# Altium PCB PoBoI.PcbDoc (part 3 of 3)
Units mm, origin at the board's own origin, x right, y up, seen from the top; angles counter-clockwise.
Board outline 90.25 x 95.8 mm, 4 copper layers (Top Layer, GND Layer, PWR Layer, Bottom Layer), stack 1.537 mm thick; 250 components, 177 nets, 942 pads, 26 vias.
Unrouted connection lines stored in the file: 170.
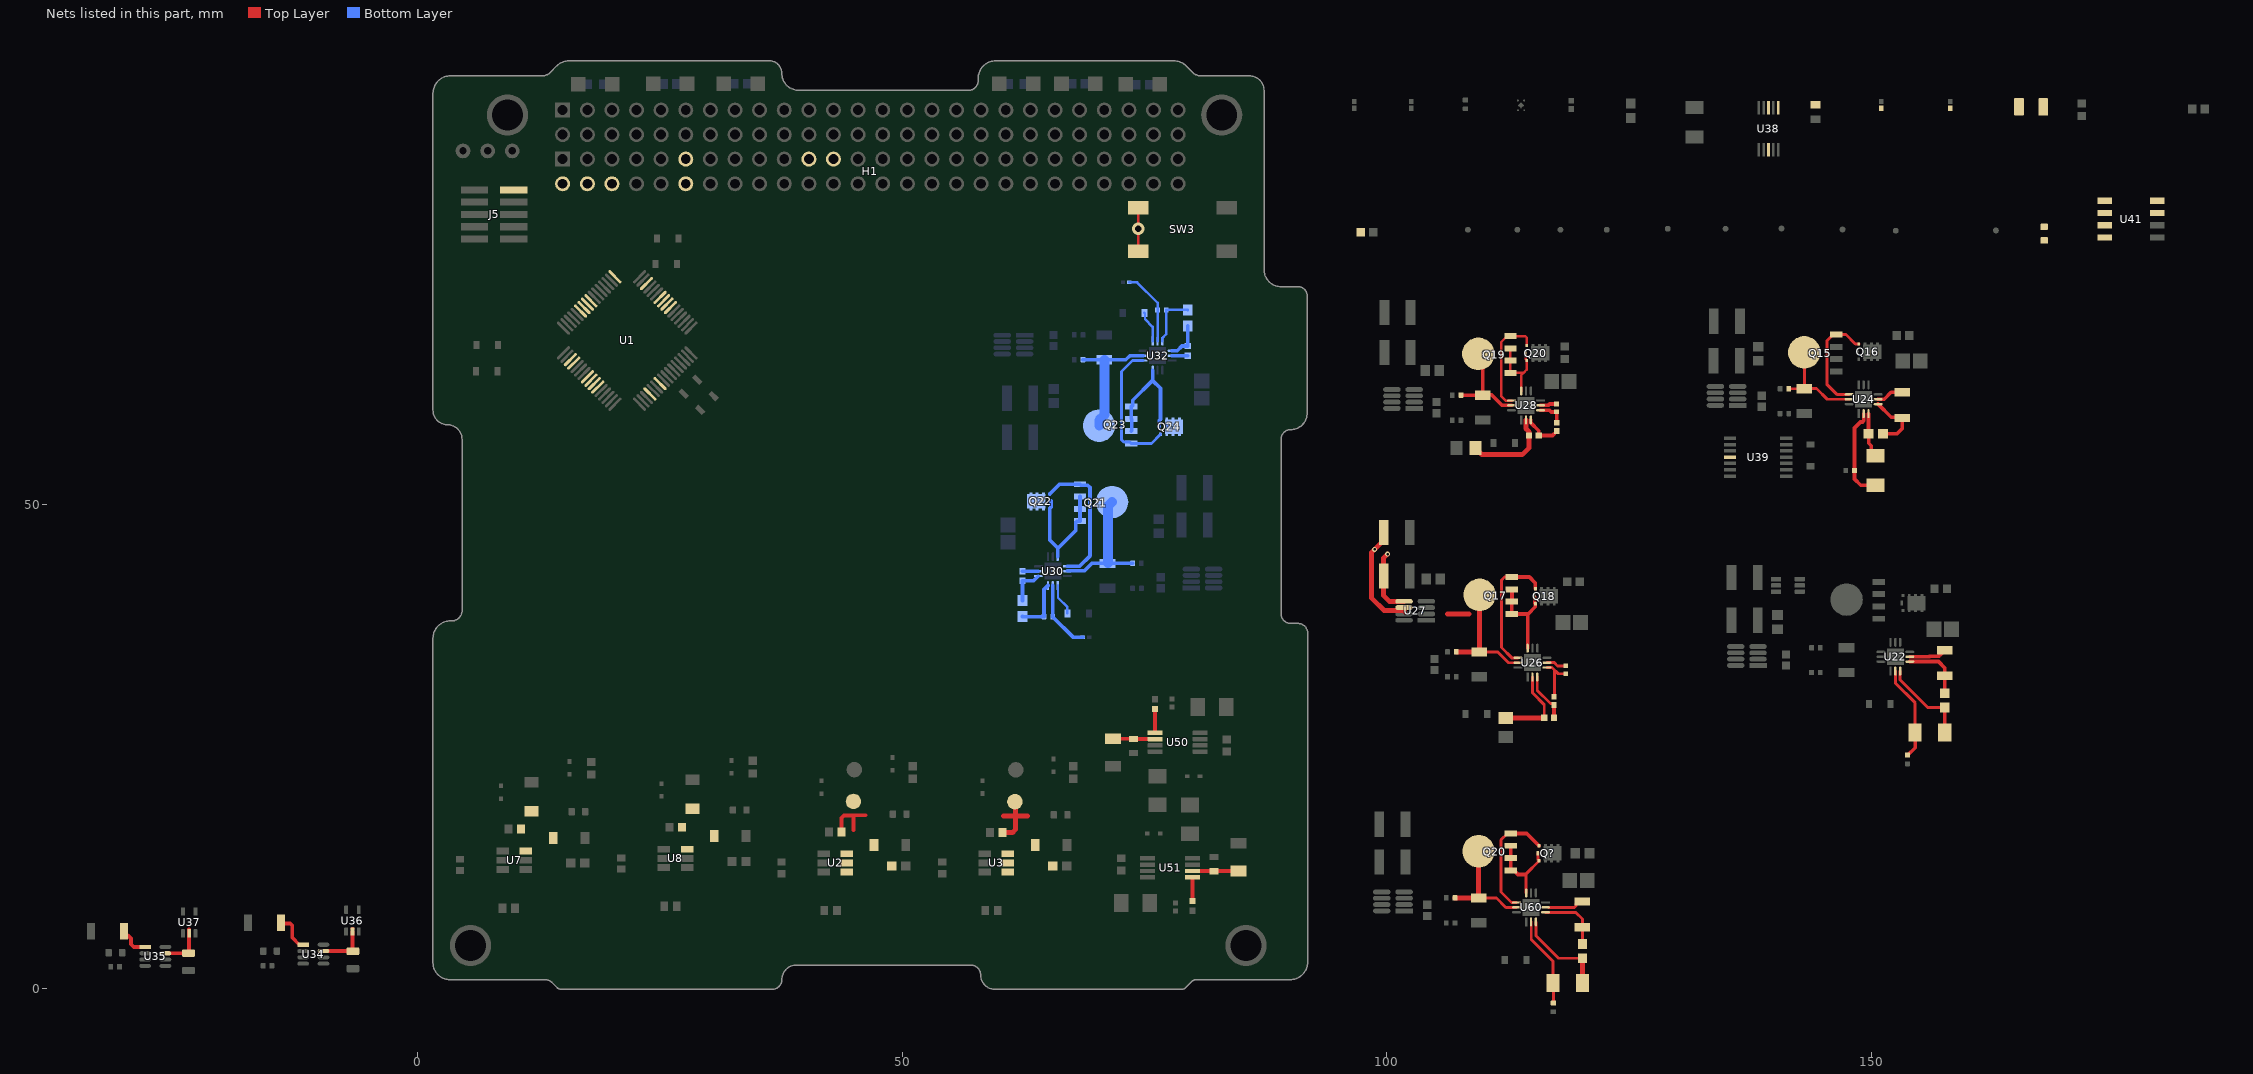
[diagram p5: the nets of this part, all layers, seen from the top]

## Via types
v1: diameter 0.508, hole 0.254, Top Layer to Bottom Layer, 17 vias
v2: diameter 1.27, hole 0.711, Top Layer to Bottom Layer, 6 vias
v3: diameter 0.4, hole 0.18, Top Layer to Bottom Layer, 3 vias

## Nets (pads, with @x,y where several pads share a name; then routed paths per layer and width w, separated by ;. In a path a pad name is that pad's centre, name@x,y a point inside that pad or via, vN(x,y) a via of type N, cw(c..) or ccw(c..) an arc to the next point about the centre after c; other vN are vias at no path point) (continued)
NetQ15_4: Q15.4 Q16.4 U24.10 | length 11.2
  Top Layer w0.305: U24.10@147.727,61.349 146.448,61.349 145.415,62.382 145.415,66.853 146.075,67.513 147.396,67.513 148.362,66.548 148.713,66.548 148.715,66.545 Q16.4@148.715,66.536
NetQ15_5-6-7-8: Q15.5-6-7-8 R94.2 R96.1 U24.11 | length 10.4
  Top Layer w0.305: R96.1@141.496,61.925 R94.2@143.077,61.925 ; Q15.5-6-7-8@143.093,65.677 143.093,61.942 144.357,61.942 145.458,60.841 U24.11@147.727,60.841
NetQ17_1: Q17.1 Q17.2 Q17.3 Q18.5 Q18.9 U26.9 | length 9.9
  Top Layer w0.381: Q17.2@112.908,39.954 Q17.1@112.908,38.684 114.545,38.684 ; Q17.2@112.928,39.975 Q17.3@112.928,41.204 ; U26.9@114.545,35.154 114.545,38.684 ; Q18.9@115.216,40.525 Q18.9@115.216,40.525 115.277,40.466 115.277,39.81 Q18.5@115.337,39.75 ; Q18.5@115.341,39.75 115.341,39.421 114.605,38.684 114.545,38.684
NetQ17_4: Q17.4 Q18.4 U26.10 | length 13.6
  Top Layer w0.3: Q17.4@112.908,42.494 112.166,42.494 111.836,42.164 111.836,35.23 112.903,34.163 U26.10@113.554,34.163
  Top Layer w0.381: Q17.4@112.908,42.494 114.727,42.494 115.337,41.885 Q18.4@115.337,41.305
NetQ17_5-6-7-8: Q17.5-6-7-8 R103.2 R105.1 U26.11 | length 14.9
  Top Layer w0.3: R103.2@109.576,34.753 111.474,34.753 112.573,33.655 U26.11@113.554,33.655
  Top Layer w0.5: 106.281,38.689 108.483,38.689 ; R105.1@107.181,34.773 107.181,34.763 109.566,34.763 R103.2@109.576,34.753 Q17.5-6-7-8@109.576,40.638
NetQ19_1: Q19.1 Q19.2 Q19.3 Q20.5 Q20.9 U28.9 | length 8.1
  Top Layer w0.254: Q19.3@112.776,66.091 112.776,64.833 112.782,64.827 Q19.2@112.776,64.821 Q19.1@112.776,63.551 114.105,63.551 ; U28.9@113.894,61.671 113.894,63.339 114.105,63.551 ; Q20.9@114.334,65.608 114.334,64.983 114.459,64.858 Q20.5@114.459,64.833 114.459,63.905 114.105,63.551
NetQ19_4: Q19.4 Q20.4@114.459,66.383 U28.10 | length 10.6
  Top Layer w0.254: U28.10@112.894,60.706 112.268,60.706 111.811,61.163 111.811,66.726 112.446,67.361 Q19.4@112.776,67.361 112.808,67.328 114.311,67.328 114.459,67.18 Q20.4@114.459,66.383
NetQ19_5-6-7-8: Q19.5-6-7-8 R112.2 R114.1 U28.11 | length 10.2
  Top Layer w0.381: R114.1@107.663,61.265 107.673,61.255 109.922,61.255 R112.2@109.931,61.246 ; Q19.5-6-7-8@109.464,65.525 109.931,65.057 R112.2@109.931,61.246 ; U28.11@112.894,60.206 111.93,60.206 110.846,61.29 109.976,61.29 R112.2@109.931,61.246
NetQ20_1: Q20.1@112.8,12.23 Q20.2@112.8,13.5 Q20.3@112.8,14.77 Q?.5 Q?.9 U60.9 | length 9
  Top Layer w0.3: U60.9@114.4,9.9 114.4,10.8 114.4,11.875 115.725,13.2 Q?.5@115.725,13.225 115.725,13.25 115.6,13.375 Q?.9@115.6,14
  Top Layer w0.381: Q20.3@112.8,14.77 Q20.2@112.8,13.5 Q20.1@112.8,12.23 113.13,12.23 113.56,11.8 114.355,11.8
NetQ20_4: Q20.4@112.8,16.04 Q?.4 U60.10 | length 12.1
  Top Layer w0.3: Q20.4@112.8,16.04 112.47,16.04 111.812,15.382 111.812,9.988 112.891,8.909 U60.10@113.409,8.909
  Top Layer w0.381: Q20.4@112.8,16.04 114.46,16.04 Q?.4@115.725,14.775
NetQ20_5-6-7-8: Q20.5-6-7-8 R150.2 R156.1 U60.11 | length 11.6
  Top Layer w0.3: R150.2@109.5,9.376 111.324,9.376 112.3,8.4 U60.11@113.4,8.4
  Top Layer w0.5: R156.1@107.05,9.4 107.05,9.376 R150.2@109.5,9.376 109.488,9.389 Q20.5-6-7-8@109.488,14.204
NetQ21_1: Q21.1 Q21.2 Q21.3 Q22.5 Q22.9 U30.9 | length 12.6
  Bottom Layer w0.381: Q22.5@65.237,49.517 65.237,46.313 66.057,45.493 ; Q22.5@65.237,49.568 65.362,49.693 Q22.9@65.362,50.292 Q22.9@65.362,50.343 ; U30.9@66.057,44.594 66.057,45.493 ; Q21.3@68.351,50.8 Q21.2@68.351,49.53 Q21.1@68.351,48.26 68.021,48.26 67.907,48.146 67.907,47.282 66.118,45.493 66.057,45.493
NetQ21_4: Q21.4 Q22.4 U30.10 | length 14.6
  Bottom Layer w0.381: Q22.4@65.237,51.067 66.24,52.07 Q21.4@68.351,52.07 68.466,51.956 69.17,51.956 69.393,51.733 69.393,44.679 68.318,43.604 U30.10@67.048,43.604
NetQ21_5-6-7-8: Q21.5-6-7-8 R121.2 R123.1 U30.11 | length 13.5
  Bottom Layer w0.381: U30.11@67.048,43.129 68.809,43.129 69.596,43.917 R121.2@71.177,43.917 ; R121.2@71.196,43.897 71.206,43.907 71.664,43.907 73.777,43.907 R123.1@73.787,43.917
  Bottom Layer w1: R121.2@71.247,43.948 71.247,49.817 Q21.5-6-7-8@71.664,50.234
NetQ23_1: Q23.1 Q23.2 Q23.3 Q24.5 Q24.9 U32.9 | length 12.3
  Bottom Layer w0.381: Q23.3@73.645,57.549 73.685,57.59 73.685,58.779 Q23.2@73.645,58.819 Q23.1@73.645,60.089 73.684,60.089 73.798,60.204 73.798,60.742 75.842,62.786 76.664,61.964 Q24.5@76.664,58.789 76.539,58.664 Q24.9@76.539,58.014 ; 75.86,62.962 U32.9@75.86,63.846
NetQ23_4: Q23.4 Q24.4 U32.10 | length 14.3
  Bottom Layer w0.305: U32.10@74.87,64.837 73.788,64.837 72.654,63.703 72.654,56.657 72.88,56.432 73.493,56.432 Q23.4@73.645,56.279 75.725,56.279 76.664,57.218 Q24.4@76.664,57.239 ; 77.282,58.082 77.282,58.102
NetQ23_5-6-7-8: Q23.5-6-7-8 R130.2 R132.1 U32.11 | length 13.4
  Bottom Layer w0.381: R132.1@68.681,64.916 R130.2@70.863,64.916 ; R130.2@70.869,64.913 73.092,64.913 73.516,65.337 U32.11@74.87,65.337
  Bottom Layer w1: Q23.5-6-7-8@70.333,58.115 70.333,58.681 70.891,59.24 R130.2@70.891,64.891
NetR80_2: R80.2 R81.1 U22.2 | length 9.8
  Top Layer w0.3: U22.2@152.484,32.782 152.484,31.564 154.532,29.517 R81.1@154.532,26.467
  Top Layer w0.381: R80.2@153.746,24.123 153.771,24.123 154.532,24.883 R81.1@154.532,26.467
NetR81_2: R81.2 R82.1 U22.3 | length 9.2
  Top Layer w0.3: U22.3@152.984,32.782 152.984,31.877 155.827,29.034 R82.1@157.582,29.034
  Top Layer w0.4: R82.1@157.582,29.034 157.582,26.469 R81.2@157.584,26.467
NetR82_2: R82.2 R83.1 U22.4 | length 6.9
  Top Layer w0.381: U22.4@153.975,33.773 156.93,33.773 157.582,33.122 R83.1@157.582,32.303 ; R83.1@157.205,32.303 R83.1@157.582,32.303 ; R82.2@157.582,30.503 R83.1@157.582,32.303
NetR83_2: R83.2 U22.5 | length 3.9
  Top Layer w0.4: U22.5@153.975,34.273 156.008,34.303 156.957,34.317 157.074,34.434 157.359,34.728 R83.2@157.582,34.957
NetR90_2: R90.2 R91.1 U24.2 | length 9.7
  Top Layer w0.381: U24.2@149.217,59.351 149.217,58.615 149.093,58.491 148.89,58.491 148.278,57.879 R90.2@148.278,53.492 148.278,52.611 148.924,51.964 R91.1@150.419,51.964
NetR91_2: R91.2 R92.1 U24.3 | length 4.6
  Top Layer w0.381: U24.3@149.717,59.351 149.717,59.344 149.726,59.335 149.726,57.286 R92.1@149.76,57.286 ; R92.1@149.735,57.277 149.735,56.31 150.002,56.043 150.002,55.433 R91.2@150.419,55.016
NetR92_2: R92.2 R93.1 U24.4 | length 6.3
  Top Layer w0.381: U24.4@150.708,60.341 152.058,58.99 R93.1@153.119,58.99 ; R92.2@151.204,57.277 152.654,57.277 153.213,57.836 R93.1@153.213,58.896
NetR93_2: R93.2 U24.5 | length 2.8
  Top Layer w0.381: U24.5@150.708,60.841 151.341,60.841 152.051,61.55 R93.2@153.213,61.55
NetR99_2: R99.2 R100.1 U26.2 | length 8.7
  Top Layer w0.3: R99.2@112.283,27.953 R99.2@112.295,27.965 ; U26.2@115.045,32.173 115.045,30.548 116.264,29.329 R100.1@116.264,27.965
  Top Layer w0.5: R99.2@112.295,27.965 R100.1@116.264,27.965
NetR100_2: R100.2 R101.1 U26.3 | length 5.1
  Top Layer w0.3: U26.3@115.545,32.173 115.545,30.796 116.897,29.443 117.147,29.443 117.272,29.318 R101.1@117.272,29.293
  Top Layer w0.381: R100.2@117.264,27.965 117.268,27.969 117.268,29.289 R101.1@117.272,29.293
NetR101_2: R101.2 R102.1 U26.4 | length 5
  Top Layer w0.3: U26.4@116.535,33.163 117.052,33.163 117.7,32.515 R102.1@118.491,32.515 ; R101.2@117.272,30.143 117.306,30.177 117.306,32.868
NetR102_2: R102.2 U26.5 | length 2.1
  Top Layer w0.3: U26.5@116.535,33.663 117.289,33.663 117.631,33.321 R102.2@118.491,33.321
NetR108_2: R108.2 R109.1 U28.2 | length 9.2
  Top Layer w0.508: R108.2@109.156,55.804 109.156,55.702 109.531,55.327 109.633,55.327 109.841,55.118 113.995,55.118 114.697,55.82 R109.1@114.697,57.099 114.706,57.109 114.706,57.48 114.384,57.802 U28.2@114.384,58.715
NetR109_2: R109.2 R110.1 U28.3 | length 4.1
  Top Layer w0.381: U28.3@114.884,58.715 114.884,58.395 115.697,57.582 R109.2@115.697,57.099 ; R109.2@115.662,57.135 R109.2@115.697,57.099 ; R110.1@117.551,57.563 117.551,57.538 117.112,57.099 R109.2@115.697,57.099
NetR110_2: R110.2 R111.1 U28.4 | length 2.9
  Top Layer w0.381: U28.4@115.875,59.706 116.799,59.706 116.985,59.519 117.501,59.519 R111.1@117.526,59.544 117.538,59.532 117.538,58.426 R110.2@117.551,58.413
NetR111_2: R111.2 U28.5 | length 1.7
  Top Layer w0.381: U28.5@115.875,60.206 116.67,60.206 116.815,60.35 R111.2@117.526,60.35
NetR117_2: R117.2 R118.1 U30.2 | length 7.2
  Bottom Layer w0.381: U30.2@65.55,41.631 R118.1@65.55,38.405 65.55,38.38 67.633,36.297 R117.2@68.661,36.297
NetR118_2: R118.2 R119.1 U30.3 | length 5.6
  Bottom Layer w0.381: R119.1@62.433,38.416 62.444,38.405 R118.2@64.65,38.405 64.65,41.206 U30.3@65.057,41.613
NetR119_2: R119.2 R120.1 U30.4 | length 3.8
  Bottom Layer w0.381: R119.2@62.433,40.07 R120.1@62.433,42.104 63.567,42.104 U30.4@64.046,42.583
NetR120_2: R120.2 U30.5 | length 1.6
  Bottom Layer w0.381: R120.2@62.433,43.104 U30.5@64.067,43.104
NetR126_2: R126.2 R127.1 U32.2 | length 8.1
  Bottom Layer w0.254: R126.2@73.452,72.898 74.259,72.898 76.36,70.797 R127.1@76.36,70.053 U32.2@76.36,66.827 U32.2@76.36,67.16
NetR127_2: R127.2 R128.1 U32.3 | length 5.6
  Bottom Layer w0.254: U32.3@76.86,66.827 76.86,67.16 77.26,67.559 R127.2@77.26,70.053 79.465,70.053 R128.1@79.477,70.042
NetR128_2: R128.2 R129.1 U32.4 | length 3.9
  Bottom Layer w0.381: U32.4@77.851,65.837 78.384,65.837 78.884,66.337 R129.1@79.477,66.337 R128.2@79.477,68.388
NetR129_2: R129.2 U32.5 | length 1.6
  Bottom Layer w0.381: U32.5@77.851,65.337 R129.2@79.477,65.337
NetR136_2: R136.2 U35.7 U37.2 | length 4.9
  Top Layer w0.381: U35.7@-25.994,3.684 U35.7@-26.001,3.678 -25.997,3.681 -23.625,3.681 R136.2@-23.622,3.684 -23.581,3.725 -23.581,6.155 -23.571,6.165
NetR138_2: R138.2 U38.6
NetR151_2: R151.2 R152.1 U60.2 | length 9.3
  Top Layer w0.3: U60.2@114.918,6.9 114.918,5.108 117.174,2.853 R152.1@117.174,0.6 117.2,0.574 R151.2@117.2,-1.45
NetR152_2: R152.2 R153.1 U60.3 | length 9.8
  Top Layer w0.3: U60.3@115.4,6.919 115.421,6.898 115.421,5.479 117.735,3.165 R153.1@120.2,3.165
  Top Layer w0.5: R153.1@120.2,3.165 120.213,3.152 120.213,0.613 R152.2@120.226,0.6
NetR153_2: R153.2 R154.1 U60.4 | length 6.7
  Top Layer w0.3: U60.4@116.4,7.9 119.5,7.9 120.2,7.2 R154.1@120.2,6.373 R153.2@120.2,4.635
NetR154_2: R154.2 U60.5 | length 3.9
  Top Layer w0.3: U60.5@116.706,8.403 119.368,8.403 119.544,8.579 119.544,8.748 119.823,9.027 R154.2@120.2,9.027
NetRc1_1: Rc1.1 U51.1 | length 2.5
  Top Layer w0.381: Rc1.1@79.959,9.06 79.959,11.508 U51.1@79.973,11.522
NetRc_1: Rc.1 U50.1 | length 2.3
  Top Layer w0.381: Rc.1@76.098,28.735 76.098,26.438 U50.1@76.11,26.426
NetRFB1_1: RFB1.1 RFB2.1 U50.2 | length 4.4
  Top Layer w0.381: U50.2@76.102,25.784 U50.2@76.11,25.776 76.101,25.785 73.898,25.785 RFB2.1@73.889,25.795 73.882,25.802 RFB1.1@71.788,25.802 ; RFB1.1@71.789,25.801 RFB1.1@71.78,25.809 RFB1.1@71.788,25.802
NetRFB11_1: RFB11.1 RFB21.1 U51.2 | length 4.7
  Top Layer w0.381: U51.2@79.973,12.172 79.981,12.163 82.161,12.163 RFB21.1@82.169,12.155 ; RFB21.1@82.194,12.153 82.2,12.158 84.729,12.158 RFB11.1@84.734,12.164
NetSW1_2: SW1.2 U34.1 | length 3.9
  Top Layer w0.381: SW1.2@-14.073,6.807 -14.023,6.756 -13.152,6.756 -12.929,6.533 -12.929,5.295 -12.19,4.556 U34.1@-11.795,4.556
NetSW2_2: SW2.2 U35.1 | length 4.1
  Top Layer w0.381: SW2.2@-30.302,6.401 -30.302,5.951 -29.554,5.202 -29.554,4.615 -29.266,4.328 U35.1@-28.101,4.328 U35.1@-28.497,4.328
NRST: C1.1 H1.6 J5.2 SW3.3 SW3.4 | length 4.5
  Top Layer w0.305: SW3.3@74.371,76.109 SW3.4@74.371,80.609
  other v2: 74.371,78.435
OBC_HB: H1.23
OBC_RST: H1.21
OBC_WD: R135.2 U34.7 U36.2 | length 5.1
  Top Layer w0.381: U34.7@-9.694,3.906 R135.2@-6.68,3.906 ; U36.2@-6.706,5.911 -6.696,5.901 -6.696,3.929 R135.2@-6.655,3.887 ; U36.2@-6.706,6.216 U36.2@-6.696,6.206
PC14OSC32_IN: C104.1 U1.3 Y1.2
PC14OSC32_OUT: C103.1 U1.4 Y1.1
R\X\_\E\n\a\b\l\e\: U1.57 U41.2
RS485_RX: U1.56 U41.1
RS485_TX: U1.59 U41.4
RS-485A: R85.2 U41.7
RS-485B: R85.1 U41.8
SCL: R106.2 U27.5 | length 6.8
  Top Layer w0.381: U27.5@101.774,40.011 U27.5@101.796,39.989
  Top Layer w0.5: v1(100.101,44.856) 100.1,44.855 100.074,44.855 99.691,44.471 99.691,40.568 100.269,39.989 U27.5@101.796,39.989
SDA: R107.2 U27.6 | length 11.5
  Top Layer w0.5: R107.2@99.691,47.092 99.691,46.291 98.45,45.051 98.45,40.321 99.732,39.04 101.803,39.04 ; 101.854,38.901 U27.6@101.854,39.192
  other v1: 98.763,45.348
Solar_TELEM_1: U1.8
Solar_TELEM_2: U1.9
Solar_TELEM_3: U1.10
Solar_TELEM_4: U1.11
StartupRead: U1.40
StartupWrite: U1.39
STM_HB: U1.20
STM_SCL: U1.41 U38.3
STM_SDA: U1.42 U38.8
SW2_1: C5.2 D2.1 L1.1 U2.6 | length 5.6
  Top Layer w0.381: C5.2@43.754,16.18 43.754,17.643 44.008,17.897 44.962,17.897 44.987,17.871 ; 44.987,16.403 44.987,17.871 ; L1.1@44.987,19.351 L1.1@44.987,19.34 L1.1@44.998,19.34 ; 46.253,17.907 45.023,17.907 44.987,17.871
SW2_2: C10.2 D4.1 L2.1 U3.6 | length 6.8
  Top Layer w0.508: C10.2@60.365,16.129 61.399,16.129 61.697,16.427 61.697,17.847 ; 60.461,17.847 61.697,17.847 ; L2.1@61.65,19.314 61.697,19.267 61.697,17.847 ; 62.932,17.847 61.697,17.847
SW_1: C21.2 D6.1 L3.1 U7.6
SW_2: C26.2 D8.1 L4.1 U8.6
SWCLK: U1.49
SWDIO: U1.46
TEMP_TELEM: H1.12
TEMP_TELEM_2: H1.11
TX_Enable: U1.58 U41.3
UART_RX: H1.4
UART_TX: H1.2
VBATT: C7.1 C19.1 U2.4 U2.5 U3.4 U3.5
VBatt_EnableP: D60.1 U30.1 | length 3.3
  Bottom Layer w0.254: U30.1@66.091,41.631 66.091,40.361 67.059,39.393 D60.1@67.059,38.735
VBatt_EnableS: D61.1 U32.1 | length 3.3
  Bottom Layer w0.254: D61.1@75.006,69.748 75.069,69.685 75.069,69.101 75.86,68.31 U32.1@75.86,66.827
VBatt_Primary: Q22.1 Q22.2 Q22.3 Q22.6 Q22.7 Q22.8 Q22.10
VBatt_Secondary: Q24.1 Q24.2 Q24.3 Q24.6 Q24.7 Q24.8 Q24.10
VBatt_stmDisableS: U1.23 U39.11
pads on no net: 3V3.1 3V3P.1 3V3S.1 5V.1 5VP.1 5VS.1 C2.1 C3.5V_Primary C4.1 C6.1 C11.1 C23.1 C25.1 C27.1 C28.1 C75.1 C79.1 C82.1 C85.1 C91.1 C94.1 C100. C101.1 C102.1 C121.1 D38.1 D41.1 D47.1 D50.1 D52.1 D53.1 D54.1 D55.1 H1.1 H1.3 H1.5 H1.7 H1.9 H1.10 H1.13 H1.15 H1.16 H1.17 H1.18 H1.19 H1.20 H1.22 H1.24 H1.25 H1.26 H1.27 H1.28 H1.29 H1.31 H1.32 H1.33 H1.34 H1.35 H1.36 H1.37 H1.38 H1.39 H1.40 H1.41 H1.42 H1.43 H1.44 H1.45 H1.46 H1.47 H1.48 H1.49 H1.50 H1.51 H1.52 H2.1 H2.2 H2.3 H2.4 H2.5 H2.6 H2.7 H2.8 H2.9 H2.10 H2.11 H2.12 H2.15 H2.16 H2.17 H2.18 H2.19 H2.20 H2.21 H2.22 H2.23 H2.24 H2.25 H2.26 H2.27 H2.28 H2.33 H2.34 H2.35 H2.36 H2.37 H2.38 H2.39 H2.40 H2.41 H2.42 H2.43 H2.44 H2.49 H2.50 H2.51 H2.52 J5.1 J5.5 J5.6 J5.7 J5.8 J5.9 J5.10 P1.3 R40.1 R88.1 R88.2 R89.1 R89.2 R90.1 R94.1 R95.1 R97.1 R97.2 R98.1 R98.2 R99.1 R103.1 R104.1 R106.1 R107.1 R115.2 R116.2 R117.1 R121.1 R122.1 R124.1 R124.2 R125.1 R125.2 R126.1 R130.1 R131.1 R133.1 R133.2 R134.1 R134.2 R135.1 R136.1 R137.1 R138.1 R157.1 R157.2 R158.1 R158.2 RLED1.2 RLED2.2 RLED3.2 RLED4.2 RLED5.2 RLED6.2 U1.2 U1.5 U1.6 U1.7 U1.14 U1.15 U1.22 U1.27 U1.28 U1.30 U1.33 U1.34 U1.35 U1.36 U1.37 U1.38 U1.44 U1.45 U1.50 U1.51 U1.52 U1.53 U1.54 U1.55 U1.60 U1.61 U1.62 U7.4 U7.5 U8.4 U8.5 U18.3 U18.4 U22.7 U23.4 U23.5 U23.6 U24.7 U24.12 U25.4 U25.5 U25.6 U25.7 U26.7 U26.12 U27.4 U27.7 U28.7 U29.5 U29.6 U29.7 U30.7 U30.12 U31.4 U31.5 U31.6 U31.8 U32.7 U32.12 U33.4 U33.5 U33.6 U33.7 U33.8 U34.6 U34.8 U35.6 U35.8 U36.1 U36.4 U36.5 U37.1 U37.4 U37.5 U38.2 U38.9 U38.10 U39.4 U39.6 U39.8 U39.9 U39.10 U39.12 U39.13 U39.14 U40.1 U40.3 U40.4 U40.5 U41.5 U50.3 U50.8 U51.3 U51.8 U60.7 U61.4 U61.5 U61.6 VBATT.1 VBATTP.1 VBATTS.1
copper on no net: | length 196.8
  Top Layer w0.25: 100.552,60.534 101.555,60.534 101.702,60.681 101.702,61.671 101.538,61.834 100.552,61.834
  Top Layer w0.3: 109.576,32.207 111.633,32.207 112.589,33.163 113.554,33.163
  Top Layer w0.305: 65.786,90.678 65.786,90.703
  Top Layer w0.381: 99.249,13.1 98.5,13.1 97.8,12.4 97.8,10.6 98.4,10 99.5,10 ; 99.249,17 98.2,17 97.2,16 97.2,10.3 98.15,9.35 99.499,9.35 ; 99.771,65.659 99.771,63.551 100.544,62.778 100.544,61.843 100.552,61.834 ; 99.771,69.799 99.745,69.773 99.745,68.148 98.654,67.056 98.654,61.408 98.877,61.184 100.535,61.184 100.544,61.193 ; 100.552,60.534 100.544,60.543 100.553,60.552 ; 101.951,13.1 101.951,17 ; 133.727,64.821 133.727,62.211 133.779,62.158 133.919,62.158 ; 133.752,68.834 133.68,68.762 133.68,67.233 132.512,66.065 132.512,62.004 132.999,61.517 133.91,61.517 133.919,61.508 ; 135.581,35.378 135.633,35.326 136.017,35.326 ; 136.008,34.684 136.017,34.676 ; 136.22,62.158 136.375,62.158 136.428,62.211 136.428,64.821 ; 136.441,68.872 136.441,64.834 136.428,64.821 ; 136.441,68.897 136.453,68.91 ; 138.282,35.361 138.318,35.326 ; 138.328,64.807 136.442,64.807 136.428,64.821 ; 141.489,59.36 141.499,59.369 143.094,59.369 143.104,59.379 144.494,59.379 145.39,60.274 147.726,60.274
  Top Layer w0.4: 135.581,35.378 135.581,38.049 ; 135.581,42.443 135.581,41.643 134.68,40.742 v3(134.671,40.742) 134.29,40.361 134.29,35.179 134.793,34.676 136.017,34.676 ; 138.282,35.361 138.282,38.049 138.282,38.269 ; 138.282,42.443 138.282,38.269 ; 138.585,38.571 138.282,38.269
  Top Layer w0.5: 102.392,47.092 102.392,44.863 102.387,44.859 102.387,44.854 102.392,44.85 102.392,42.391 102.455,42.328 104.038,42.328 104.075,42.291 v1@104.075,40.882 ; 104.075,39.989 v1@104.075,40.869 ; 107.181,32.207 107.181,32.204 109.572,32.204 ; v1(109.576,30.886) 109.576,32.201 ; 138.585,38.571 140.335,38.571
  Top Layer w0.508: 141.202,33.36 142.256,33.36 142.977,32.639 ; 154.664,39.814 156.171,39.814 156.525,40.168 156.525,41.275
  Top Layer w0.762: 42.926,88.138 42.926,90.678 ; 45.466,88.138 45.466,90.678 ; 48.006,88.138 48.006,90.678 ; 55.626,88.138 55.626,90.678 ; 65.786,88.138 65.786,90.678 ; 68.326,88.138 68.326,90.678
  Bottom Layer w0.381: 60.089,65.497 60.073,65.497 60.02,65.444 60.02,62.27 60.243,62.047 60.517,62.047 60.829,61.735 60.829,60.935 ; 60.343,66.147 60.334,66.138 59.307,66.138 59.03,65.861 59.03,57.404 59.512,56.921 60.829,56.921 ; 62.392,65.495 62.412,65.475 63.151,65.475 ; 62.644,65.497 63.268,65.497 63.53,65.235 63.53,61.735 ; 63.53,56.921 63.53,60.935 63.53,61.588 63.842,61.9 65.659,61.9 ; 76.479,47.002 78.449,47.002 78.761,47.314 ; 78.816,47.833 78.816,43.726 79.226,43.317 79.85,43.317 ; 78.837,47.854 78.837,51.714 ; 81.538,51.714 81.605,51.781 82.737,51.781 83.447,51.071 83.447,43.019 83.104,42.676 82.416,42.676 82.406,42.666 ; 81.538,47.854 81.538,47.053 81.85,46.741 82.149,46.741 82.372,46.518 82.372,43.332 82.398,43.307
  Bottom Layer w0.508: 67.048,42.604 68.508,42.604 69.767,41.345 71.196,41.345 71.206,41.335 73.79,41.335 73.794,41.331 73.794,41.326 ; 68.674,67.488 68.674,67.482 68.678,67.478 70.856,67.478 70.866,67.469 70.871,67.464 72.135,67.464 73.614,65.985 74.757,65.985 74.887,65.854
  other v1: 104.089,40.869 102.387,44.856
  other v3: 135.581,36.173

## Polygon pours and split planes (outlines as drawn)
NetD12_2 on Top Layer "NetD11_2" (solid, remove dead copper, pour order 47): 71.962,16.372 71.962,13.197 76.103,13.197 76.103,16.372
NetD11_2 on Top Layer "NetD11_2" (solid, remove dead copper, pour order 48): 79.972,24.765 79.972,21.59 84.112,21.59 84.112,24.765
SW2_1 on Top Layer "GND" (solid, remove dead copper, pour order 35): 43.561,19.177 43.561,20.269 46.584,20.269 46.584,16.424 48.15,16.424 48.15,13.503 43.553,13.503 43.553,19.177
5V_1 on Top Layer "Top Layer-3V3_1" (solid, remove dead copper, pour order 38): 37.008,23.063 37.008,12.751 38.583,12.751 38.583,21.082 46.99,21.082 46.99,17.272 49.809,17.272 49.809,23.063
5V_2 on Top Layer "Top Layer-3V3_1" (solid, remove dead copper, pour order 41): 53.594,23.063 53.594,12.751 55.169,12.751 55.169,21.082 63.576,21.082 63.576,17.272 66.396,17.272 66.396,23.063
BOOST2_2 on Top Layer "GND" (solid, remove dead copper, pour order 44): 57.336,19.805 57.328,19.813 57.328,20.498 59.258,20.498 59.258,19.805 59.266,19.805 59.266,13.506 57.336,13.506 57.336,13.556
GND on Top Layer "Top Layer-GND" (solid, remove dead copper, pour order 43): 68.739,11.811 66.403,11.811 66.403,16.332 66.606,16.332 66.606,22.174 68.739,22.174
SW2_2 on Top Layer "GND" (solid, remove dead copper, pour order 42): 60.177,19.195 60.177,20.287 63.199,20.287 63.199,16.442 64.766,16.442 64.766,13.521 60.168,13.521 60.168,19.195
VBATT on Top Layer "GND" (solid, remove dead copper, pour order 40): 60.757,7.315 60.757,13.132 66.243,13.132 66.243,7.315
FB2_2 on Top Layer "GND" (solid, remove dead copper, pour order 39): 59.245,12.497 59.245,7.29 53.53,7.29 53.48,7.341 53.48,12.497
FB2_1 on Top Layer "GND" (solid, remove dead copper, pour order 31): 42.657,12.491 42.657,7.284 36.942,7.284 36.892,7.335 36.892,12.491
VBATT on Top Layer "GND" (solid, remove dead copper, pour order 26): 27.661,7.772 27.661,13.589 33.147,13.589 33.147,7.772
FB_2 on Top Layer "GND" (solid, remove dead copper, pour order 25): 26.177,12.943 26.177,7.736 20.462,7.736 20.411,7.787 20.411,12.943
VBATT on Top Layer "GND" (solid, remove dead copper, pour order 15): 11.024,7.595 11.024,13.411 16.51,13.411 16.51,7.595
FB_1 on Top Layer "GND" (solid, remove dead copper, pour order 14): 9.525,12.776 9.525,7.569 3.81,7.569 3.759,7.62 3.759,12.776
GND on Top Layer "Top Layer-GND" (solid, remove dead copper, pour order 36): 52.15,11.811 49.813,11.811 49.813,16.332 50.016,16.332 50.016,22.174 52.15,22.174
BOOST2_1 on Top Layer "GND" (solid, remove dead copper, pour order 33): 40.724,19.805 40.716,19.813 40.716,20.498 42.647,20.498 42.647,19.805 42.655,19.805 42.655,13.506 40.724,13.506 40.724,13.556
VBATT on Top Layer "GND" (solid, remove dead copper, pour order 32): 44.145,7.315 44.145,13.132 49.632,13.132 49.632,7.315
3V3_2 on Top Layer "Top Layer-3V3_1" (solid, remove dead copper, pour order 30): 30.378,17.729 33.249,17.729 33.249,22.758 20.396,22.758 20.396,13.157 21.971,13.157 21.971,20.777 30.378,20.777
SW_2 on Top Layer "GND" (solid, remove dead copper, pour order 29): 29.705,16.891 31.636,16.891 31.636,13.97 27.038,13.97 27.038,19.71 29.705,19.71
GND on Top Layer "Top Layer-GND" (solid, remove dead copper, pour order 28): 35.662,12.294 33.325,12.294 33.325,16.815 33.528,16.815 33.528,22.657 35.662,22.657
BOOST_2 on Top Layer "GND" (solid, remove dead copper, pour order 27): 26.162,13.97 26.162,20.269 24.232,20.269 24.232,14.021 24.232,13.97
GND on Top Layer "Top Layer-GND" (solid, remove dead copper, pour order 24): 18.999,12.167 16.662,12.167 16.662,16.688 16.866,16.688 16.866,22.53 18.999,22.53
3V3_1 on Top Layer "Top Layer-3V3_1" (solid, remove dead copper, pour order 22): 13.741,17.501 16.612,17.501 16.612,22.53 3.759,22.53 3.759,12.929 5.334,12.929 5.334,20.549 13.741,20.549
BOOST_1 on Top Layer "GND" (solid, remove dead copper, pour order 17): 9.55,13.767 9.55,20.066 7.62,20.066 7.62,13.818 7.569,13.767
SW_1 on Top Layer "GND" (solid, remove dead copper, pour order 16): 13.081,16.688 15.011,16.688 15.011,13.767 10.414,13.767 10.414,19.507 13.081,19.507
GND on GND Layer (split plane): 504 vertices, not listed, extent 2.111,0.468 91.342,95.25
no net on PWR Layer (split plane): 504 vertices, not listed, extent 2.111,0.468 91.342,95.25

## Silkscreen, mask and mechanical layers (free items; w line width, h text height)
Top Overlay:
  region: 1143 vertices and 187 holes, not listed, extent -26.56,40.033 3.338,48.224
  text "SSRL UGA / LEARNSat_POBOI  / Matthew Fernandez / Pranav Sutraway" at -22.469,48.641 h1

## Text inside footprints (layer, text, board x,y; h text height)
U38: Mechanical 13 "*" at 139.442,86.995 h1.88 r90; Mechanical 13 "*" at 139.442,86.995 h1.88 r90